# EAGLE board OOBD-Tiger (EAGLE 7.2.0)

Size 63.39 x 38.18 mm. Coordinates in mm from the lower left corner, seen from the top.
Outline: 0,0 63.39,0 63.39,38.18 0,38.18 0,0
Copper layers (1*16): Top 0.0356mm / dielectric 1.5011mm / Bottom 0.0356mm
Design rules "oshpark-2layer": minimum track width 6mil, minimum drill 13mil, track to track 6mil, track to pad 6mil, pad to pad 6mil, via to via 6mil, smd to smd 6mil, copper to edge 15mil, drill to drill 6mil, minimum pad ring 7mil, minimum via ring 7mil, stop-mask expansion 2.5mil, vias tented up to drill 0mil, thermal gap 10mil
Net classes: 2 lan_sh: clearance 0.762 mm
Holes 1.6 mm at 31.75,36.2

## Footprints (pad centres in the part's own frame; a part is rotated, then mirrored left to right if it is on the bottom)
OOBD-TIGER-AM3352-SOM = smd 0.7 x 1.8: 3-1 27.94,-13.208; 3-2 27.94,-17.272; 3-3 26.67,-13.208; 3-4 26.67,-17.272; 3-5 25.4,-13.208; 3-6 25.4,-17.272; 3-7 24.13,-13.208; 3-8 24.13,-17.272; 3-9 22.86,-13.208; 3-10 22.86,-17.272; 3-11 21.59,-13.208; 3-12 21.59,-17.272; 3-13 20.32,-13.208; 3-14 20.32,-17.272; 3-15 19.05,-13.208; 3-16 19.05,-17.272; 3-17 17.78,-13.208; 3-18 17.78,-17.272; 3-19 16.51,-13.208; 3-20 16.51,-17.272; 3-21 15.24,-13.208; 3-22 15.24,-17.272; 3-23 13.97,-13.208; 3-24 13.97,-17.272; 3-25 12.7,-13.208; 3-26 12.7,-17.272; 3-27 11.43,-13.208; 3-28 11.43,-17.272; 3-29 10.16,-13.208; 3-30 10.16,-17.272; 3-31 8.89,-13.208; 3-32 8.89,-17.272; 3-33 7.62,-13.208; 3-34 7.62,-17.272; 3-35 6.35,-13.208; 3-36 6.35,-17.272; 3-37 5.08,-13.208; 3-38 5.08,-17.272; 3-39 3.81,-13.208; 3-40 3.81,-17.272; 4-1 -3.81,-13.208; 4-2 -3.81,-17.272; 4-3 -5.08,-13.208; 4-4 -5.08,-17.272; 4-5 -6.35,-13.208; 4-6 -6.35,-17.272; 4-7 -7.62,-13.208; 4-8 -7.62,-17.272; 4-9 -8.89,-13.208; 4-10 -8.89,-17.272; 4-11 -10.16,-13.208; 4-12 -10.16,-17.272; 4-13 -11.43,-13.208; 4-14 -11.43,-17.272; 4-15 -12.7,-13.208; 4-16 -12.7,-17.272; 4-17 -13.97,-13.208; 4-18 -13.97,-17.272; 4-19 -15.24,-13.208; 4-20 -15.24,-17.272; 4-21 -16.51,-13.208; 4-22 -16.51,-17.272; 4-23 -17.78,-13.208; 4-24 -17.78,-17.272; 4-25 -19.05,-13.208; 4-26 -19.05,-17.272; 4-27 -20.32,-13.208; 4-28 -20.32,-17.272; 4-29 -21.59,-13.208; 4-30 -21.59,-17.272; 4-31 -22.86,-13.208; 4-32 -22.86,-17.272; 4-33 -24.13,-13.208; 4-34 -24.13,-17.272; 4-35 -25.4,-13.208; 4-36 -25.4,-17.272; 4-37 -26.67,-13.208; 4-38 -26.67,-17.272; 4-39 -27.94,-13.208; 4-40 -27.94,-17.272 | hole 0.7: 27.305,-15.24; 4.445,-15.24; -4.445,-15.24; -27.305,-15.24
BATTCON_12MM_PTH = smd 7.62 x 7.62: GND 0,0 | drill 1.854 square: VCC@1 -6.604,0; VCC@2 6.604,0
C0603 = smd 1.1 x 1: 1 -0.85,0; 2 0.85,0
C0603K = smd 1.05 x 1.08: 1 -0.875,0; 2 0.875,0
0603-CAP = smd 1.1 x 1: 1 -0.85,0; 2 0.85,0
PANASONIC_D = smd 3 x 1.4: + 2.4,0; - -2.4,0
SOT23 = smd 1 x 1.4: 1 -0.95,-1.1; 2 0.95,-1.1; 3 0,1.1
DO214AA = smd 1.778 x 2.286: A 2.177,0; C -2.177,0
1X02 = drill 1.016 pad 1.88: 1 0,0; 2 2.54,0
SOIC-16W = smd 0.6 x 2.2: 1 -4.445,-4.6; 2 -3.175,-4.6; 3 -1.905,-4.6; 4 -0.635,-4.6; 5 0.635,-4.6; 6 1.905,-4.6; 7 3.175,-4.6; 8 4.445,-4.6; 9 4.445,4.6; 10 3.175,4.6; 11 1.905,4.6; 12 0.635,4.6; 13 -0.635,4.6; 14 -1.905,4.6; 15 -3.175,4.6; 16 -4.445,4.6
JP3Q = drill 0.914 octagon: 1 -2.54,-1.27; 2 -2.54,1.27; 3 0,-1.27; 4 0,1.27; 5 2.54,-1.27; 6 2.54,1.27
L0603 = smd 1 x 1.1: 1 -0.85,0; 2 0.85,0
8X8MM_3131 = smd 3.6 x 6: 1 -3.1,0; 2 3.1,0
LED_0603 = smd 1.016 x 1.016: A 0.889,0; C -0.889,0
2X05/90 = drill 1.016 octagon: 1 -5.08,-6.35; 2 -5.08,-3.81; 3 -2.54,-6.35; 4 -2.54,-3.81; 5 0,-6.35; 6 0,-3.81; 7 2.54,-6.35; 8 2.54,-3.81; 9 5.08,-6.35; 10 5.08,-3.81
LED-0603 = smd 1.016 x 1.016: A 0.889,0; C -0.889,0
R0603 = smd 1 x 1.1: 1 -0.85,0; 2 0.85,0
R0805 = smd 1.3 x 1.5: 1 -0.85,0; 2 0.85,0
QFN40-6X6 = smd 0.95 x 0.28: 1 -3.025,2.25; 2 -3.025,1.75; 3 -3.025,1.25; 4 -3.025,0.75; 5 -3.025,0.25; 6 -3.025,-0.25; 7 -3.025,-0.75; 8 -3.025,-1.25; 9 -3.025,-1.75; 10 -3.025,-2.25; 21 3.025,-2.25; 22 3.025,-1.75; 23 3.025,-1.25; 24 3.025,-0.75; 25 3.025,-0.25; 26 3.025,0.25; 27 3.025,0.75; 28 3.025,1.25; 29 3.025,1.75; 30 3.025,2.25 | smd 0.28 x 0.95: 11 -2.25,-3.025; 12 -1.75,-3.025; 13 -1.25,-3.025; 14 -0.75,-3.025; 15 -0.25,-3.025; 16 0.25,-3.025; 17 0.75,-3.025; 18 1.25,-3.025; 19 1.75,-3.025; 20 2.25,-3.025; 31 2.25,3.025; 32 1.75,3.025; 33 1.25,3.025; 34 0.75,3.025; 35 0.25,3.025; 36 -0.25,3.025; 37 -0.75,3.025; 38 -1.25,3.025; 39 -1.75,3.025; 40 -2.25,3.025 | drill 0.3 pad 1.1 square: EP@1 -1.525,1.525; EP@2 -0.5,1.525; EP@3 0.5,1.525; EP@4 1.525,1.525; EP@5 -1.525,0.475; EP@6 -0.5,0.475; EP@7 0.5,0.475; EP@8 1.525,0.475; EP@9 -1.525,-0.475; EP@10 -0.5,-0.475; EP@11 0.5,-0.475; EP@12 1.525,-0.475; EP@13 -1.525,-1.525; EP@14 -0.5,-1.525; EP@15 0.5,-1.525; EP@16 1.525,-1.525
SO-08 = smd 0.6 x 2.2: 1 -1.905,-2.6; 2 -0.635,-2.6; 3 0.635,-2.6; 4 1.905,-2.6; 5 1.905,2.6; 6 0.635,2.6; 7 -0.635,2.6; 8 -1.905,2.6
SOT23-5 = smd 1.2 x 0.55: 1 1.3,-0.95; 2 1.3,0; 3 1.3,0.95; 4 -1.3,0.95; 5 -1.3,-0.95
SOIC8 = smd 0.6 x 2.2: 1 -1.905,-2.6; 2 -0.635,-2.6; 3 0.635,-2.6; 4 1.905,-2.6; 5 1.905,2.6; 6 0.635,2.6; 7 -0.635,2.6; 8 -1.905,2.6
SOT23-5' = smd 0.55 x 1.2: 1 -0.95,-1.3; 2 0,-1.3; 3 0.95,-1.3; 4 0.95,1.3; 5 -0.95,1.3
USB_PN87520_DEV_PTH = drill 1 long: 1 3.5,2.71; 2 1,2.71; 3 -1,2.71; 4 -3.5,2.71 | drill 2.2: P$1 6.07,0; P$2 -6.07,0 | hole 1.1: -2.25,0; 2.25,0
USB_MINI_9PIN = smd 2.25 x 0.5: D+ 2.706,0; D- 2.706,0.8; GND 2.706,-1.6; ID 2.706,-0.8; VBUS 2.706,1.6 | smd 4 x 2.1: GND1 -1.9,4.95; GND3 -1.9,-4.95 | smd 3.5 x 2.1: GND2 2.35,4.95; GND4 2.35,-4.95 | hole 1: 0,2.2; 0,-2.2
1X02_LOCK = drill 1.016 pad 1.88: 1 -0.178,0; 2 2.718,0

## Placement (x,y rotation side)
AM3352-SOM-EVB-PLATFORM  4XGPH127SMT-02X20(PA-V16X-2X20-LF)  [OOBD-TIGER-AM3352-SOM]  31.75,19.68 0 top
BAT1  3,6V  [BATTCON_12MM_PTH]  24.13,31.11 0 bottom
C3  NI (10nF)  [C0603]  55.88,36.2 180 top
C11  100nF  [C0603K]  43.81,29.21 90 top
C14  NI (10nF)  [C0603]  55.88,36.2 180 bottom
C22  100nF  [C0603K]  53.98,29.21 90 bottom
C23  100nF  [C0603K]  6.99,27.3 180 top
C24  100nF  [C0603K]  5.08,23.5 90 top
C25  22uF/6.3V  [C0603]  2.54,30.48 90 top
C26  22uF/6.3V  [C0603]  8.26,12.7 270 top
C27  22uF/6.3V  [C0603]  4.45,30.48 90 top
C28  22uF/6.3V  [C0603]  11.43,17.78 270 top
C29  100nF  [C0603K]  11.43,35.56 0 top
C30  100nF  [C0603K]  9.84,17.78 270 top
C35  10µF  [0603-CAP]  40.64,16.51 270 top
C36  0.1µF  [0603-CAP]  41.91,16.51 270 top
C37  10µF  [0603-CAP]  37.47,16.51 90 top
C38  0.1nF  [0603-CAP]  36.2,16.51 90 top
C39  22µF  [0603-CAP]  33.66,22.23 0 top
C40  0.1µF  [0603-CAP]  33.66,23.5 0 top
C41  10µF  [0603-CAP]  40.01,27.94 90 top
C42  10µF  [0603-CAP]  34.92,27.94 90 top
C43  0.1µF  [0603-CAP]  41.27,27.94 90 top
C44  0.1µF  [0603-CAP]  36.2,27.94 90 top
C45  NI (0,01µF)  [0603-CAP]  31.11,24.13 90 top
C46  NI (0,01µF)  [0603-CAP]  31.11,20.95 270 top
C47  1uF  [C0603]  32.38,33.66 180 top
C48  470uF/25V/LOWESR/105C  [PANASONIC_D]  24.13,21.59 180 bottom
C49  100nF  [C0603]  52.7,19.05 0 top
C50  100nF  [C0603]  22.86,15.56 180 top
C51  10nF  [C0603]  16.51,12.7 270 top
C52  3.3nF  [C0603]  33.02,15.24 90 top
C53  22uF/6.3V  [C0603]  13.97,28.57 90 bottom
C54  22uF/6.3V  [C0603]  12.7,28.57 90 bottom
C55  22uF/6.3V  [C0603]  11.43,28.57 90 bottom
C56  22uF/6.3V  [C0603]  10.16,28.57 90 bottom
C57  1µf  [0603-CAP]  42.55,12.7 270 top
C58  NI (47pF)  [0603-CAP]  45.72,12.7 270 top
C59  2.2µf  [0603-CAP]  36.2,12.7 270 top
D1  PESD1CAN  [SOT23]  55.24,33.02 0 top
D2  PESD1CAN  [SOT23]  55.24,33.02 0 bottom
D3  SMBJ16A  [DO214AA]  21.59,13.34 90 bottom
HS-CAN  OPEN  [1X02]  58.42,31.11 180 bottom
IC3  DS3231  [SOIC-16W]  24.13,31.11 180 top
JP1  Audio-Out  [JP3Q]  38.73,34.29 0 top
L1  FB0805/600R/200mA(201209-601)  [L0603]  11.43,36.83 180 top
L2  FB0805/600R/2A  [L0603]  2.54,24.77 180 top
L3  FB0805/600R/2A  [L0603]  6.99,28.57 180 top
L4  FB0805/600R/2A  [L0603]  6.99,23.5 270 top
L5  FB0805/600R/200mA(201209-601)  [L0603]  44.45,12.7 270 top
L6  10uH/3.15A/20%  [8X8MM_3131]  15.24,21.59 90 bottom
LED1  LED/Yellow/0603  [LED_0603]  1.91,3.81 180 bottom
LED2  LED/Red/0603  [LED_0603]  1.91,6.35 180 bottom
MS-CAN  OPEN  [1X02]  58.42,28.57 180 bottom
OOBD2-CONNECTOR  In-Car Diagnostic  [2X05/90]  65.41,20.32 90 bottom
OOBDPICAN  Bridge to OOBDpiCAN  [JP3Q]  59.05,10.79 180 bottom
PWR_LED  LED/Red/0603  [LED-0603]  1.91,1.27 180 bottom
R2  60R  [R0603]  58.42,35.56 270 top
R3  60R  [R0603]  60.33,35.56 270 top
R4  NI  [R0603]  48.9,34.92 0 top
R5  10k  [R0603]  48.9,33.02 0 top
R9  60R  [R0603]  59.69,36.83 0 bottom
R10  60R  [R0603]  59.69,34.92 0 bottom
R11  NI  [R0603]  48.9,34.92 0 bottom
R12  10k  [R0603]  48.9,33.02 0 bottom
R15  13k/1%  [R0603]  8.26,17.78 90 top
R16  6k8k/1%  [R0603]  12.06,12.7 90 bottom
R17  10k  [R0603]  13.34,31.75 180 top
R18  10k  [R0603]  12.7,13.97 0 top
R19  10k/1%  [R0603]  13.97,12.7 90 bottom
R20  2.2k/1%  [R0603]  13.34,27.3 180 top
R21  NI  [R0603]  13.34,30.48 0 top
R22  0R  [R0603]  13.34,28.57 0 top
R23  2.2k/1%  [R0603]  15.24,12.7 90 bottom
R24  NI  [R0603]  12.06,11.43 270 top
R25  0R  [R0603]  13.97,11.43 270 top
R26  10K  [R0603]  45.72,19.68 0 top
R27  10K  [R0603]  45.72,20.95 0 top
R28  0R  [R0805]  33.66,20.32 180 top
R29  0R  [R0805]  33.66,25.4 180 top
R30  2.2k/1%  [R0603]  52.7,24.13 180 top
R31  NI  [R0603]  52.7,17.78 0 top
R32  10k  [R0603]  26.35,12.06 90 top
R33  10k  [R0603]  18.41,34.92 90 top
R34  49.9R/1%  [R0603]  52.7,16.51 180 top
R35  2.2k/1%  [R0603]  34.29,15.24 270 top
R36  1.05k/1%  [R0603]  20.95,8.89 180 top
R37  4.99k/1%  [R0603]  17.14,12.7 90 bottom
R38  2.2k/1%  [R0603]  7.62,3.81 0 bottom
R39  2.2k/1%  [R0603]  7.62,1.27 0 bottom
R40  2.2k/1%  [R0603]  7.62,6.35 0 bottom
TLV320AIC1  Audio-Amplifier  [QFN40-6X6]  39.37,22.23 180 top
U1  SN65HVD230(SO8)  [SO-08]  48.9,29.21 270 top
U2  SN65HVD230(SO8)  [SO-08]  48.9,29.21 270 bottom
U3  SY6280  [SOT23-5]  9.53,31.75 270 top
U4  SY6280  [SOT23-5]  13.97,17.14 90 top
U5  MP1482  [SOIC8]  20.95,12.06 270 top
U6  TLV70215  [SOT23-5']  39.37,12.7 90 top
USB_HOST  USB_A_VERTICAL  [USB_PN87520_DEV_PTH]  2.54,15.24 90 bottom
USB_OTG  USB-OTG  [USB_MINI_9PIN]  4.45,30.48 180 bottom
WAKE-UP  Open  [1X02_LOCK]  53.34,21.59 0 bottom

## Library data of the parts
AM3352-SOM-EVB-PLATFORM = OOBDtiger-Connector
BAT1 HS-CAN MS-CAN WAKE-UP = SparkFun
C3 C14 R2 R3 R9 R10 R28 R29 = resistor
C11 C22-C30 C47 C49-C56 L1-L5 R4 R5 R11 R12 R15-R25 R30-R40 = rcl
C35-C40 C45 C46 C58 = SparkFun-Passives; MANEX: 123-0001115
C41-C44 C57 C59 = SparkFun-Passives; MANEX: 123-0001032
C48 = SparkFun-Capacitors; PROD_ID: CAP-10547
D1 D2 = Industrialberry
D3 L6 = OLIMEX_DISCRET
IC3 = DS3231_industrialberry
JP1 OOBDPICAN = jumper
LED1 LED2 PWR_LED = DOUBLE-SIDE
OOBD2-CONNECTOR = pinhead
R26 R27 = resistor; MANEX: 110-0002014
TLV320AIC1 = TLV320AIC3107
U1 U2 = arm
U3-U5 = OLIMEX_IC
U6 = SparkFun-PowerIC
USB_HOST USB_OTG = OLIMEX_CONNECTORS

## Nets
3V3 [PWR]: AM3352-SOM-EVB-PLATFORM.4-3
+3V3: AM3352-SOM-EVB-PLATFORM.3-3 C11.1 C22.1 C35.2 C36.2 C41.1 C42.1 C43.1 C44.1 C47.2 C57.2 IC3.2 R26.2 R27.2 R30.2 R33.2 TLV320AIC1.12 TLV320AIC1.13 TLV320AIC1.18 TLV320AIC1.21 TLV320AIC1.40 U1.3 U2.3 U6.1 U6.3
+5V: AM3352-SOM-EVB-PLATFORM.3-1 AM3352-SOM-EVB-PLATFORM.4-1 C29.1 C30.1 C39.2 C40.2 C53.1 C54.1 C55.1 C56.1 L6.2 OOBDPICAN.1 R37.2 R39.1 TLV320AIC1.25 U3.5 U4.5
+5V_OTG_PWR: C23.1 L3.1 USB_OTG.VBUS
+12V: C48.+ D3.C OOBD2-CONNECTOR.10 R32.1 U5.2
AGND: C45.1 C46.1 JP1.5 L5.2 TLV320AIC1.11 TLV320AIC1.22 TLV320AIC1.27 TLV320AIC1.30
AUD_BCLK: AM3352-SOM-EVB-PLATFORM.4-19 TLV320AIC1.35
AUD_DIN: AM3352-SOM-EVB-PLATFORM.4-18 TLV320AIC1.38
AUD_DOUT: AM3352-SOM-EVB-PLATFORM.4-20 TLV320AIC1.37
AUD_MCLK: AM3352-SOM-EVB-PLATFORM.4-24 TLV320AIC1.34
AUD_WCLK: AM3352-SOM-EVB-PLATFORM.4-17 TLV320AIC1.36
DCAN0_RX: AM3352-SOM-EVB-PLATFORM.4-7 U2.4
DCAN0_TX: AM3352-SOM-EVB-PLATFORM.4-8 U2.1
DCAN1_RX: AM3352-SOM-EVB-PLATFORM.4-13 U1.4
DCAN1_TX: AM3352-SOM-EVB-PLATFORM.4-14 U1.1
DVDD: C37.2 C38.2 C59.2 TLV320AIC1.33 U6.5
EXT_WAKEUP: AM3352-SOM-EVB-PLATFORM.3-20 R34.1
GND [PWR]: AM3352-SOM-EVB-PLATFORM.3-2 AM3352-SOM-EVB-PLATFORM.3-4 AM3352-SOM-EVB-PLATFORM.4-2 AM3352-SOM-EVB-PLATFORM.4-4 AM3352-SOM-EVB-PLATFORM.4-40 BAT1.GND C3.2 C11.2 C14.2 C22.2 C23.2 C24.2 C25.2 C26.2 C27.2 C28.2 C29.2 C30.2 C35.1 C36.1 C37.1 C38.1 C39.1 C40.1 C41.2 C42.2 C43.2 C44.2 C47.1 C48.- C49.2 C50.2 C53.2 C54.2 C55.2 C56.2 C57.1 C58.1 C59.1 D1.3 D2.3 D3.A IC3.5 IC3.6 IC3.7 IC3.8 IC3.9 IC3.10 IC3.11 IC3.12 IC3.13 JP1.6 L1.1 L2.1 L5.1 LED1.C LED2.C OOBD2-CONNECTOR.3 OOBDPICAN.5 PWR_LED.C R5.2 R12.2 R15.1 R16.1 R17.1 R18.1 R19.1 R31.2 R35.2 R36.2 TLV320AIC1.16 TLV320AIC1.24 TLV320AIC1.39 U1.2 U2.2 U3.2 U4.2 U5.4 U6.2 USB_HOST.4 USB_OTG.GND
HS-CAN_H: D1.2 OOBD2-CONNECTOR.7 R2.2 U1.7
HS-CAN_L: D1.1 HS-CAN.1 OOBD2-CONNECTOR.6 U1.6
HS-CAN_RS: AM3352-SOM-EVB-PLATFORM.4-26 R4.2
I2C0-SCL: AM3352-SOM-EVB-PLATFORM.4-15 IC3.16 R26.1 TLV320AIC1.1
I2C0-SDA: AM3352-SOM-EVB-PLATFORM.4-16 IC3.15 R27.1 TLV320AIC1.2
LED1: AM3352-SOM-EVB-PLATFORM.4-21 R38.1
LED2: AM3352-SOM-EVB-PLATFORM.4-23 R40.1
MS-CAN_H: D2.2 OOBD2-CONNECTOR.1 R9.2 U2.7
MS-CAN_L: D2.1 MS-CAN.1 OOBD2-CONNECTOR.2 U2.6
MS-CAN_RS: AM3352-SOM-EVB-PLATFORM.4-25 R11.2
N$1: LED2.A R40.2
N$2: C3.1 R2.1 R3.1
N$3: R16.2 U4.3
N$4: C50.1 U5.8
N$5: R4.1 R5.1 U1.8
N$6: R32.2 U5.7
N$7: C51.1 U5.1
N$8: C51.2 L6.1 U5.3
N$9: C52.1 U5.6
N$10: C14.1 R9.1 R10.1
N$11: C52.2 R35.1
N$12: C58.2 U6.4
N$13: C26.1 C28.1 L4.1 R23.2 U4.1
N$14: JP1.1 TLV320AIC1.20
N$15: C45.2 JP1.4 R29.2
N$16: C46.2 JP1.2 R28.2
N$17 [PWR]: R28.1 TLV320AIC1.26
N$18: R29.1 TLV320AIC1.23
N$19: JP1.3 TLV320AIC1.19
N$27: IC3.3 R33.1
N$28: C24.1 L4.2 USB_HOST.1
N$29: L2.2 USB_HOST.P$1 USB_HOST.P$2
N$30: HS-CAN.2 R3.2
N$32: MS-CAN.2 R10.2
N$43: R30.1 WAKE-UP.1
N$44: C49.1 R31.1 R34.2 WAKE-UP.2
N$62: R36.1 R37.1 U5.5
N$80: R11.1 R12.1 U2.8
N$99: R15.2 U3.3
N$100: C25.1 C27.1 L3.2 R20.2 U3.1
N$129: PWR_LED.A R39.2
N$231: LED1.A R38.2
N$266: L1.2 USB_OTG.GND1 USB_OTG.GND2 USB_OTG.GND3 USB_OTG.GND4
SYS_RESETN: AM3352-SOM-EVB-PLATFORM.4-28 IC3.4 TLV320AIC1.31
USB0_CE: AM3352-SOM-EVB-PLATFORM.3-14 R21.2
USB0_DM: AM3352-SOM-EVB-PLATFORM.3-15 USB_OTG.D-
USB0_DP: AM3352-SOM-EVB-PLATFORM.3-13 USB_OTG.D+
USB0_DRV: AM3352-SOM-EVB-PLATFORM.3-16 R22.2
USB0_EN: R17.2 R21.1 R22.1 U3.4
USB0_ID: AM3352-SOM-EVB-PLATFORM.3-12 USB_OTG.ID
USB0_VBUS: AM3352-SOM-EVB-PLATFORM.3-11 R20.1
USB1_CE: AM3352-SOM-EVB-PLATFORM.3-8 R24.2
USB1_DM: AM3352-SOM-EVB-PLATFORM.3-9 OOBDPICAN.2 USB_HOST.2
USB1_DP: AM3352-SOM-EVB-PLATFORM.3-7 OOBDPICAN.4 USB_HOST.3
USB1_DRV: AM3352-SOM-EVB-PLATFORM.3-10 R25.2
USB1_EN: R18.2 R24.1 R25.1 U4.4
USB1_ID: AM3352-SOM-EVB-PLATFORM.3-6 R19.2
USB1_VBUS: AM3352-SOM-EVB-PLATFORM.3-5 R23.1
VBAT: BAT1.VCC@1 IC3.14

## Tracks (layer width: path | path; a pad name or v marks a point on that pad's centre or on a via)
+3V3  (24 unrouted)
+5V  (16 unrouted)
+5V_OTG_PWR  (2 unrouted)
+12V  (4 unrouted)
AGND  (7 unrouted)
AUD_BCLK  (1 unrouted)
AUD_DIN  (1 unrouted)
AUD_DOUT  (1 unrouted)
AUD_MCLK  (1 unrouted)
AUD_WCLK  (1 unrouted)
DCAN0_RX  (1 unrouted)
DCAN0_TX  (1 unrouted)
DCAN1_RX  (1 unrouted)
DCAN1_TX  (1 unrouted)
DVDD  (4 unrouted)
EXT_WAKEUP  (1 unrouted)
GND  (80 unrouted)
HS-CAN_H  (3 unrouted)
HS-CAN_L  (3 unrouted)
HS-CAN_RS  (1 unrouted)
I2C0-SCL  (3 unrouted)
I2C0-SDA  (3 unrouted)
LED1  (1 unrouted)
LED2  (1 unrouted)
MS-CAN_H  (3 unrouted)
MS-CAN_L  (3 unrouted)
MS-CAN_RS  (1 unrouted)
N$1  (1 unrouted)
N$2  (2 unrouted)
N$3  (1 unrouted)
N$4  (1 unrouted)
N$5  (2 unrouted)
N$6  (1 unrouted)
N$7  (1 unrouted)
N$8  (2 unrouted)
N$9  (1 unrouted)
N$10  (2 unrouted)
N$11  (1 unrouted)
N$12  (1 unrouted)
N$13  (4 unrouted)
N$14  (1 unrouted)
N$15  (2 unrouted)
N$16  (2 unrouted)
N$17  (1 unrouted)
N$18  (1 unrouted)
N$19  (1 unrouted)
N$27  (1 unrouted)
N$28  (2 unrouted)
N$29  (2 unrouted)
N$30  (1 unrouted)
N$32  (1 unrouted)
N$43  (1 unrouted)
N$44  (3 unrouted)
N$62  (2 unrouted)
N$80  (2 unrouted)
N$99  (1 unrouted)
N$100  (4 unrouted)
N$129  (1 unrouted)
N$231  (1 unrouted)
N$266  (4 unrouted)
SYS_RESETN  (2 unrouted)
USB0_CE  (1 unrouted)
USB0_DM  (1 unrouted)
USB0_DP  (1 unrouted)
USB0_DRV  (1 unrouted)
USB0_EN  (3 unrouted)
USB0_ID  (1 unrouted)
USB0_VBUS  (1 unrouted)
USB1_CE  (1 unrouted)
USB1_DM  (2 unrouted)
USB1_DP  (2 unrouted)
USB1_DRV  (1 unrouted)
USB1_EN  (3 unrouted)
USB1_ID  (1 unrouted)
USB1_VBUS  (1 unrouted)
VBAT  (1 unrouted)